# Allegro board shield_STM32F429.brd
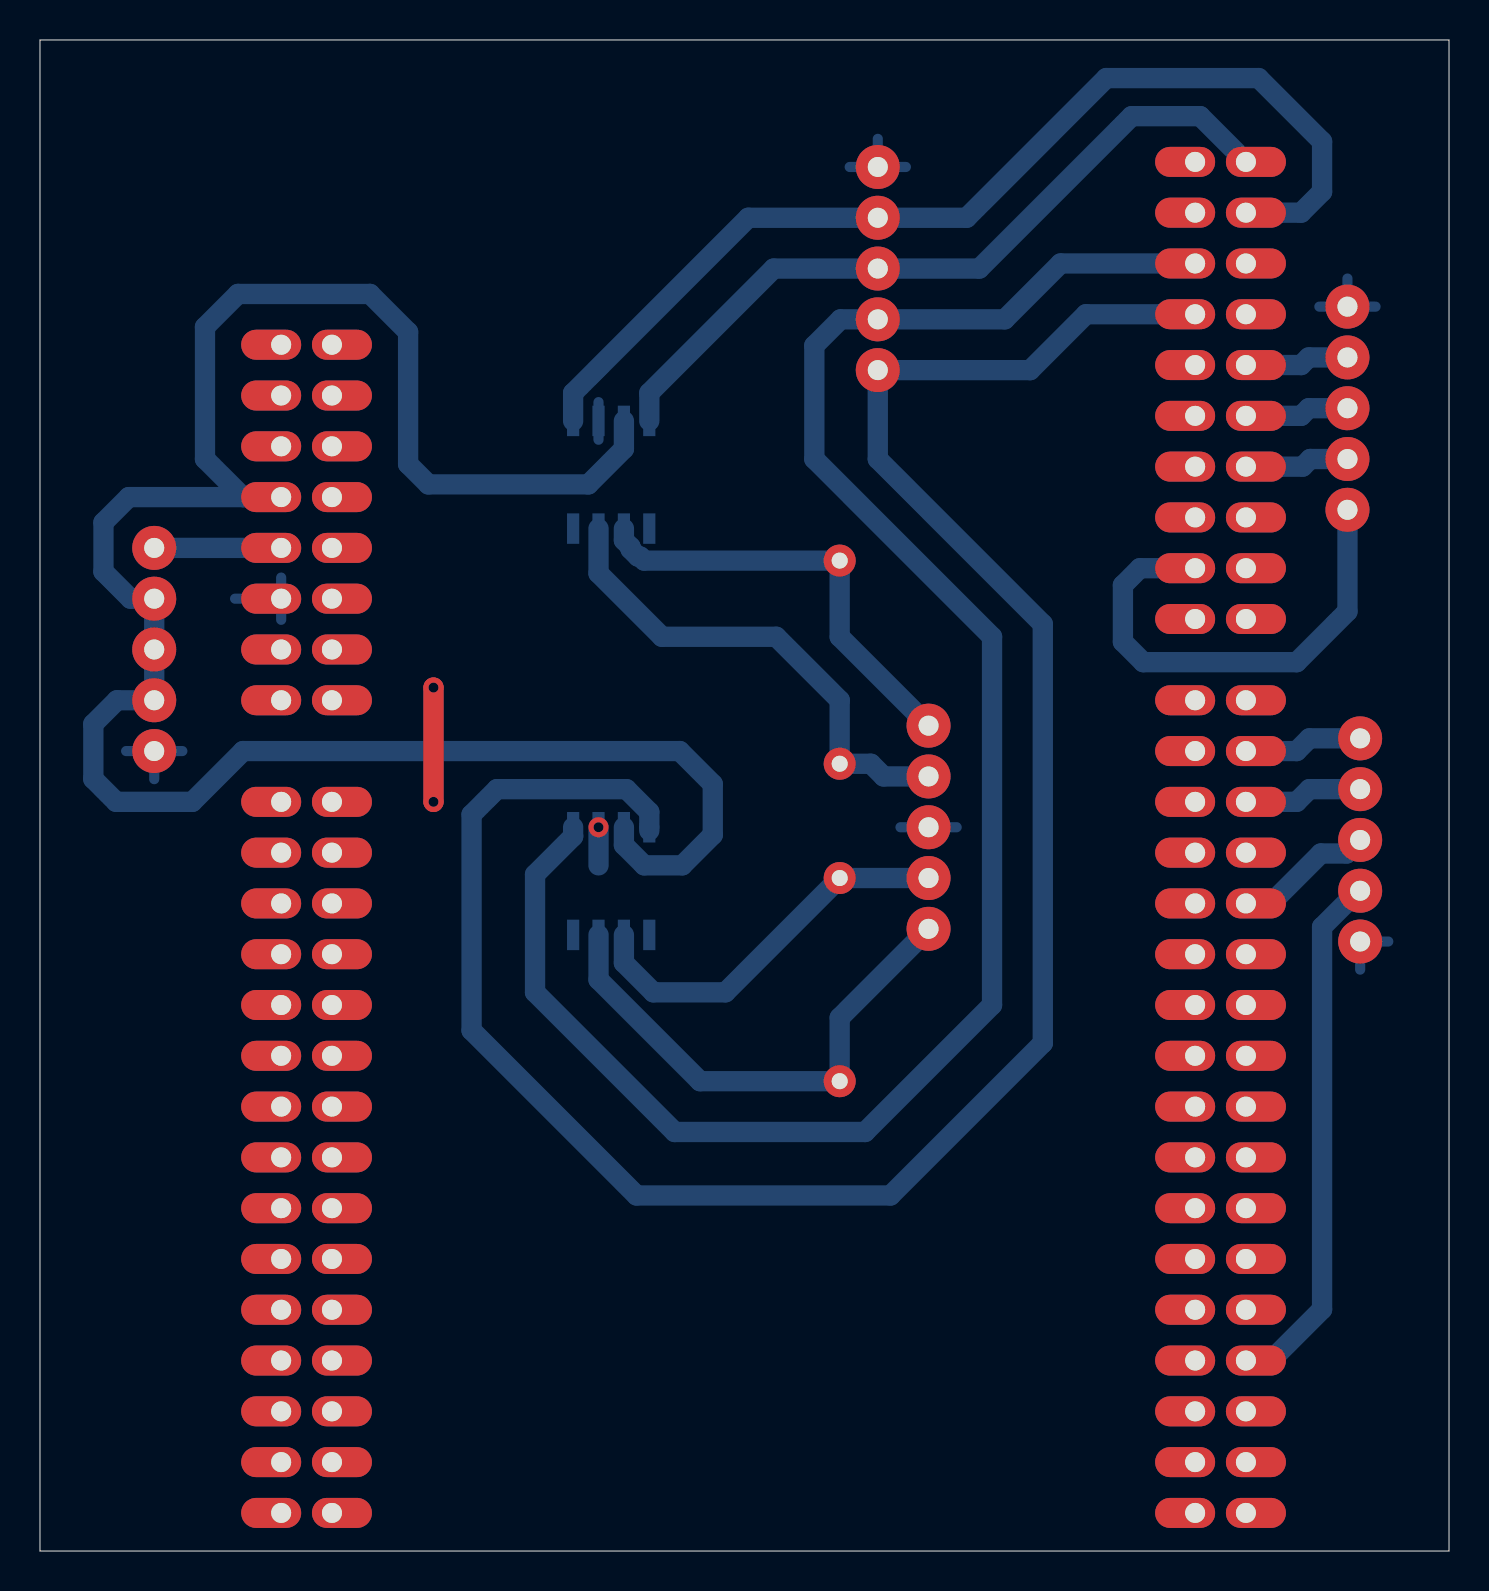
[diagram p0: board, top side]
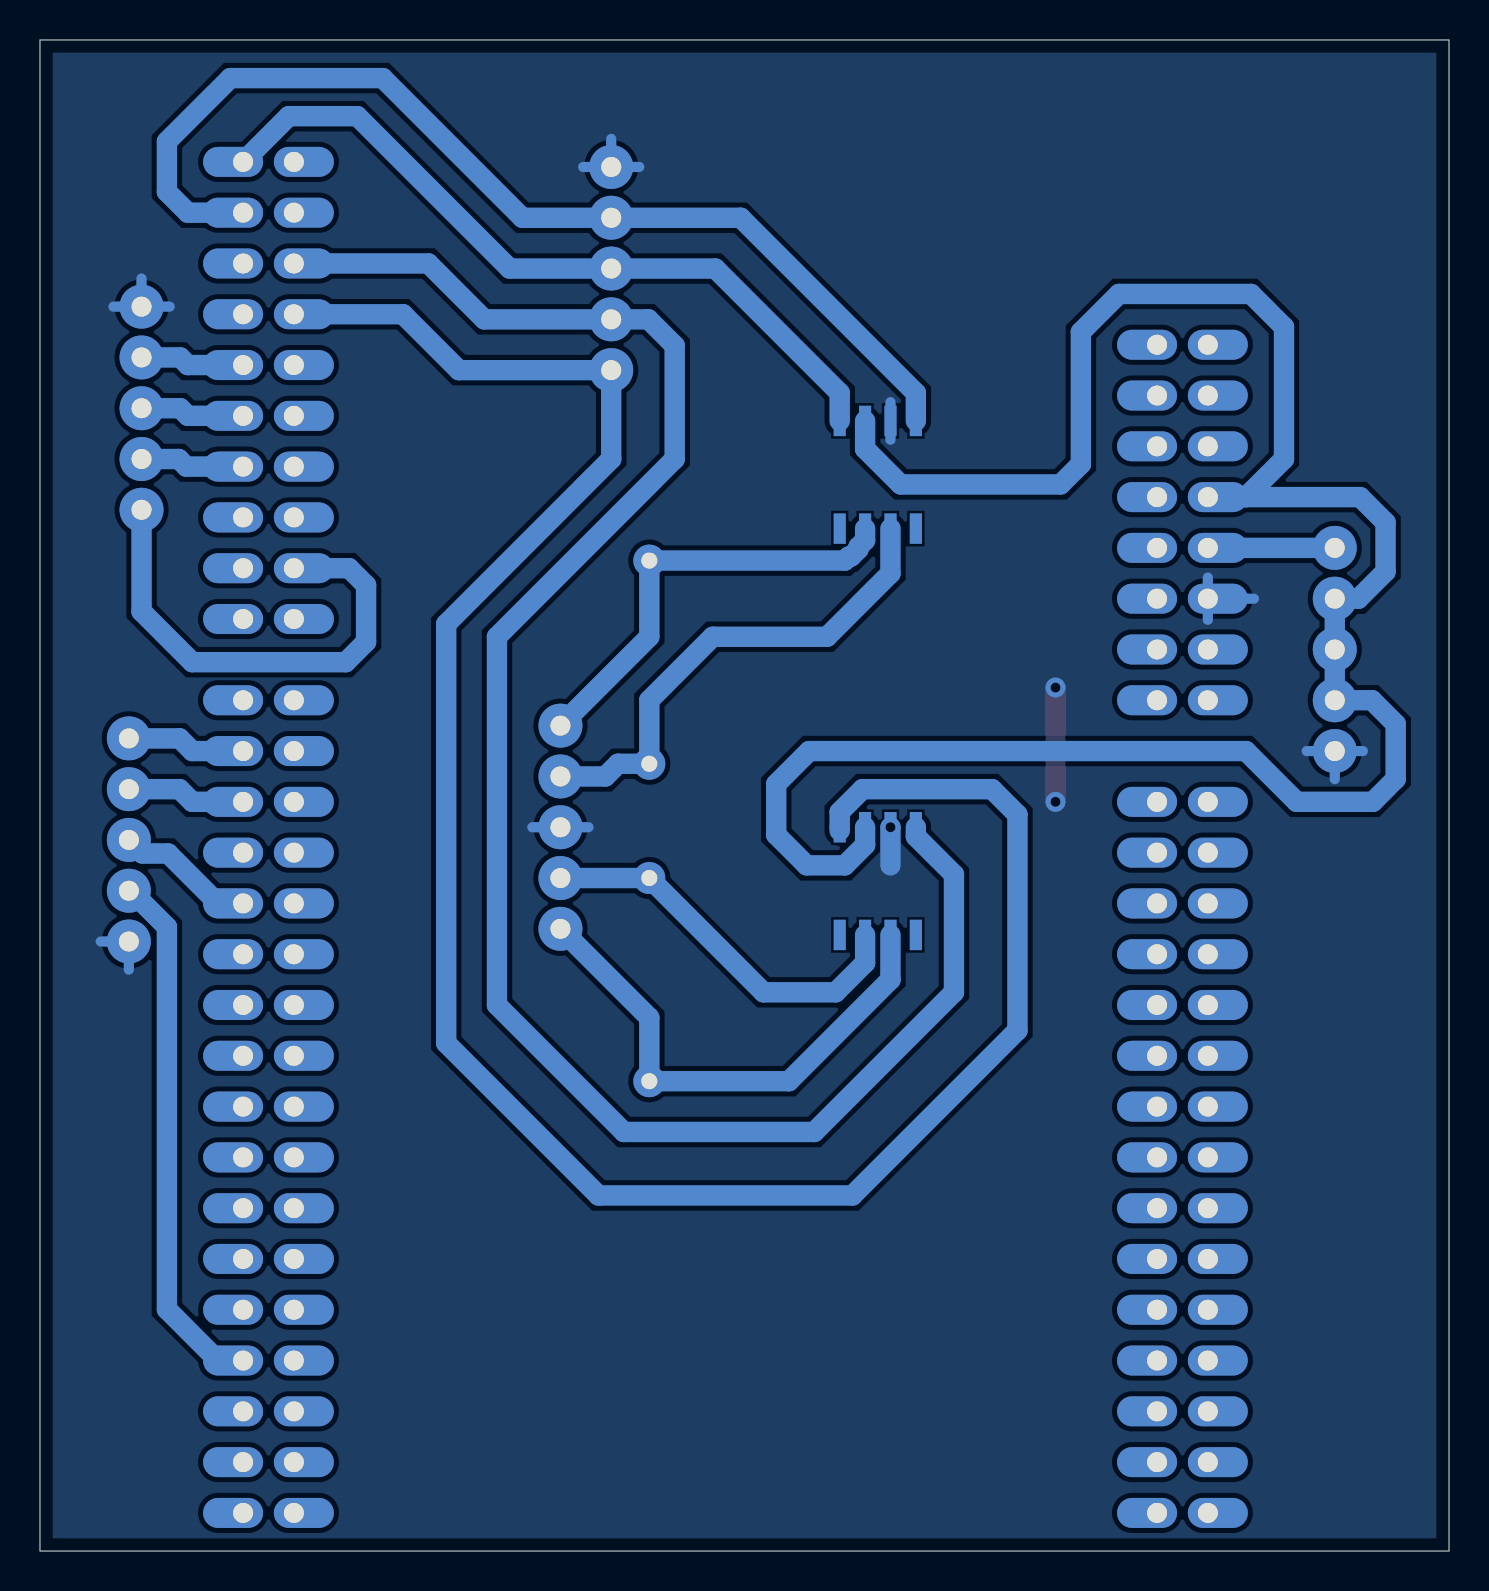
[diagram p1: board, bottom side, seen from below]

Outline 70.48 x 75.56 mm; copper layers: TOP, BOTTOM. Coordinates in mm from the lower left corner of the outline.
Outline path: 0,75.56 70.48,75.56 70.48,0 0,0 0,75.56

## Placement (name value [footprint] x y rotation side)
J1  HEADER 5  [CON_05]  66.04 40.64 270 top
J2  HEADER 5  [CON_05]  41.91 69.22 270 top
J3  HEADER 5  [CON_05]  44.45 41.27 270 top
J4  HEADER 5  [CON_05]  5.71 50.16 270 top
J5  HEADER 5  [CON_05]  65.41 62.23 270 top
R1  120  [RES_01]  40 23.5 90 top
R2  120  [RES_01]  40 49.53 270 top
U2  sn69hvd232d  [SN65HVD232D]  26.67 56.52 270 bottom
U3  sn69hvd232d  [SN65HVD232D]  26.67 36.2 270 bottom
U4  nucleo_144_shield  [NUCLEO_144_SHIELD]  12.06 1.91 0 top

## Library data of the parts
J1-J5 = HEADER 5
R1 R2 = R
U2 U3 = sn69hvd232d
U4 = nucleo_144_shield

## Footprints (pads in the part's own frame, mm; a bottom-side part is the same pattern mirrored in y, then rotated)
CON_05
  round 2.2 hole 1: 1(0,0) 2(2.54,0) 3(5.08,0) 4(7.62,0) 5(10.16,0)
NUCLEO_144_SHIELD
  oval 3x1.5 hole 1: 1(0,58.42) 2(2.54,58.42) 3(0,55.88) 4(2.54,55.88) 5(0,53.34) 6(2.54,53.34) 7(0,50.8) 8(2.54,50.8) 9(0,48.26) 10(2.54,48.26) 11(0,45.72) 12(2.54,45.72) 13(0,43.18) 14(2.54,43.18) 15(0,40.64) 16(2.54,40.64) 17(0,35.56) 18(2.54,35.56) 19(0,33.02) 20(2.54,33.02) 21(0,30.48) 22(2.54,30.48) 23(0,27.94) 24(2.54,27.94) 25(0,25.4) 26(2.54,25.4) 27(0,22.86) 28(2.54,22.86) 29(0,20.32) 30(2.54,20.32) 31(0,17.78) 32(2.54,17.78) 33(0,15.24) 34(2.54,15.24) 35(0,12.7) 36(2.54,12.7) 37(0,10.16) 38(2.54,10.16) 39(0,7.62) 40(2.54,7.62) 41(0,5.08) 42(2.54,5.08) 43(0,2.54) 44(2.54,2.54) 45(0,0) 46(2.54,0) 47(45.72,67.564) 48(48.26,67.564) 49(45.72,65.024) 50(48.26,65.024) 51(45.72,62.484) 52(48.26,62.484) 53(45.72,59.944) 54(48.26,59.944) 55(45.72,57.404) 56(48.26,57.404) 57(45.72,54.864) 58(48.26,54.864) 59(45.72,52.324) 60(48.26,52.324) 61(45.72,49.784) 62(48.26,49.784) 63(45.72,47.244) 64(48.26,47.244) 65(45.72,44.704) 66(48.26,44.704) 67(45.72,40.64) 68(48.26,40.64) 69(45.72,38.1) 70(48.26,38.1) 71(45.72,35.56) 72(48.26,35.56) 73(45.72,33.02) 74(48.26,33.02) 75(45.72,30.48) 76(48.26,30.48) 77(45.72,27.94) 78(48.26,27.94) 79(45.72,25.4) 80(48.26,25.4) 81(45.72,22.86) 82(48.26,22.86) 83(45.72,20.32) 84(48.26,20.32) 85(45.72,17.78) 86(48.26,17.78) 87(45.72,15.24) 88(48.26,15.24) 89(45.72,12.7) 90(48.26,12.7) 91(45.72,10.16) 92(48.26,10.16) 93(45.72,7.62) 94(48.26,7.62) 95(45.72,5.08) 96(48.26,5.08) 97(45.72,2.54) 98(48.26,2.54) 99(45.72,0) 100(48.26,0)
RES_01
  round 1.6 hole 0.8: 1(0,0) 2(10.16,0)
SN65HVD232D
  rect 1.524x0.61 smd: 1(0,0) 2(0,-1.27) 3(0,-2.54) 4(0,-3.81) 5(5.385,-3.81) 6(5.385,-2.54) 7(5.385,-1.27) 8(5.385,0)

## Nets
+3V3: J4.2 J4.3 J4.4 U2.3(VCC) U3.3(VCC) U4.7(+3V3)
+5V: J4.1 U4.9(+5V)
0: J1.5 J2.1 J3.3 J4.5 J5.1 U2.2(GND) U3.2(GND) U4.11(GND1)
CAN1_H: J3.2 R2.2 U2.7(CAN_H)
CAN1_L: J3.1 R2.1 U2.6(CAN_L)
CAN1RX_PB8: J2.3 U2.4(R) U4.48(PB8)
CAN1TX_PB9: J2.2 U2.1(D) U4.50(PB9)
CAN2_H: J3.5 R1.1 U3.7(CAN_H)
CAN2_L: J3.4 R1.2 U3.6(CAN_L)
CAN2RX_PB12: J2.5 U3.4(R) U4.53(PB12)
CAN2TX_PB13: J2.4 U3.1(D) U4.51(PB13)
CH1_PE9: J1.1 U4.70(PE9)
CH2_PE11: J1.2 U4.72(PE11)
CH3_PE13: J1.3 U4.76(PE13)
CH4_PE14: J1.4 U4.94(PE14)
PA4: J5.5 U4.63(PA4)
PA5: J5.2 U4.56(PA5)
PA6: J5.3 U4.58(PA6)
PA7: J5.4 U4.60(PA7)

Pads without a net: U2 5 8; U3 5 8; U4 1 2 3 4 5 6 8 10 12 13 14 15 16 17 18 19 20 21 22 23 24 25 26 27 28 29 30 31 32 33 34 35 36 37 38 39 40 41 42 43 44 45 46 47 49 52 54 55 57 59 61 62 64 65 66 67 68 69 71 73 74 75 77 78 79 80 81 82 83 84 85 86 87 88 89 90 91 92 93 95 96 97 98 99 100

## Via types
v1: diameter 1, hole 0.5, TOP to BOTTOM, 3 vias

## Routing (per net, layer and track width the routed paths; a pad name or vN(x,y) marks a point on that pad's centre or on a via; arc(x,y) is an arc through that point)
+3V3: length 109.4
  BOTTOM w1.016: U2.3 29.21,55.12 27.43,53.34 19.43,53.34 18.42,54.36 18.42,60.96 16.51,62.87 9.91,62.87 8.26,61.21 8.26,54.61 10.16,52.7 ; U3.3 29.21,35.31 30.23,34.29 32.13,34.29 33.66,35.81 33.66,38.35 32,40.01 10.16,40.01 7.62,37.47 3.81,37.47 2.67,38.61 2.67,41.36 3.85,42.55 J4.4 J4.3 J4.2 4.53,47.62 3.17,48.98 3.17,51.44 4.45,52.7 10.16,52.7 ; 10.16,52.7 U4.7
+5V: length 6.3
  BOTTOM w1.016: J4.1 U4.9
0: length 32.2
  TOP w1.016: v1(19.69,43.18) v1(19.69,37.47)
  BOTTOM w0.508: 64,62.23 J5.1 ; J5.1 66.81,62.23 ; J5.1 65.41,63.64 ; 4.31,40.01 J4.5 ; J4.5 5.71,38.6 ; J4.5 7.12,40.01 ; J2.1 41.91,70.62 ; J2.1 40.5,69.22 ; J2.1 43.32,69.22 ; 67.45,30.48 J1.5 66.04,29.07 ; 45.86,36.2 J3.3 43.04,36.2 ; 27.94,55.57 U2.2 27.94,57.46 ; 12.06,46.57 U4.11 ; U4.11 12.06,48.68 ; U4.11 9.76,47.62
  BOTTOM w1.016: v1(27.94,36.2) 27.94,34.29
CAN1_H: length 24.8
  BOTTOM w1.016: U2.7 27.94,48.9 31.12,45.72 36.83,45.72 40,42.55 R2.2 41.57,39.37 42.2,38.73 J3.2
CAN1_L: length 22
  BOTTOM w1.016: J3.1 40,45.72 R2.1 30.23,49.53 30.02,49.73 29.91,49.73 29.54,50.1 29.54,50.22 29.21,50.55 U2.6
CAN1RX_PB8: length 37.9
  BOTTOM w1.016: U4.48 58.04,71.75 54.61,71.75 46.99,64.14 J2.3 36.7,64.14 30.48,57.91 U2.4
CAN1TX_PB9: length 53.5
  BOTTOM w1.016: U4.50 63.09,66.93 64.14,67.98 64.14,70.48 60.96,73.66 53.34,73.66 46.35,66.67 J2.2 35.43,66.67 26.67,57.91 U2.1
CAN2_H: length 25.9
  BOTTOM w1.016: U3.7 27.94,28.57 33.02,23.5 R1.1 40,26.67 J3.5
CAN2_L: length 19.6
  BOTTOM w1.016: J3.4 R1.2 34.29,27.94 30.68,27.94 29.21,29.41 U3.6
CAN2RX_PB12: length 110.9
  BOTTOM w1.016: 57.78,61.85 52.32,61.85 49.53,59.05 J2.5 41.91,54.61 50.16,46.35 50.16,25.4 42.54,17.78 29.85,17.78 21.59,26.04 21.59,36.83 22.86,38.1 29.34,38.1 30.48,36.96 U3.4 30.48,36.03
CAN2TX_PB13: length 94.8
  BOTTOM w1.016: U4.51 51.05,64.39 48.26,61.59 J2.4 40.05,61.59 38.73,60.28 38.73,54.61 47.62,45.72 47.62,27.3 41.27,20.95 31.75,20.95 24.77,27.94 24.77,33.83 26.67,35.74 U3.1
CH1_PE9: length 6
  BOTTOM w1.016: J1.1 63.5,40.64 62.86,40.01 U4.70
CH2_PE11: length 6
  BOTTOM w1.016: U4.72 62.86,37.47 63.5,38.1 J1.2
CH3_PE13: length 7
  BOTTOM w1.016: U4.76 61.58,32.38 64.07,34.88 65.36,34.88 J1.3
CH4_PE14: length 26.6
  BOTTOM w1.016: U4.94 61.58,9.53 64.14,12.08 64.14,31.21 65.95,33.02 J1.4
PA4: length 24.6
  BOTTOM w1.016: U4.63 55.02,49.15 54.17,48.3 54.17,45.47 55.19,44.45 62.87,44.45 65.41,46.99 J5.5
PA5: length 5.2
  BOTTOM w1.016: J5.2 63.47,59.69 63.09,59.31 60.32,59.31
PA6: length 5.2
  BOTTOM w1.016: J5.3 63.47,57.15 63.09,56.77 U4.58
PA7: length 5.2
  BOTTOM w1.016: J5.4 63.54,54.61 63.16,54.23 U4.60

## Copper pours and planes (outline as drawn; the poured copper is in the pictures)
0 on BOTTOM: 0.64,0.64 0.64,74.93 69.85,74.93 69.85,0.64
